# EAGLE board Linear Regulator (EAGLE 7.1.0)
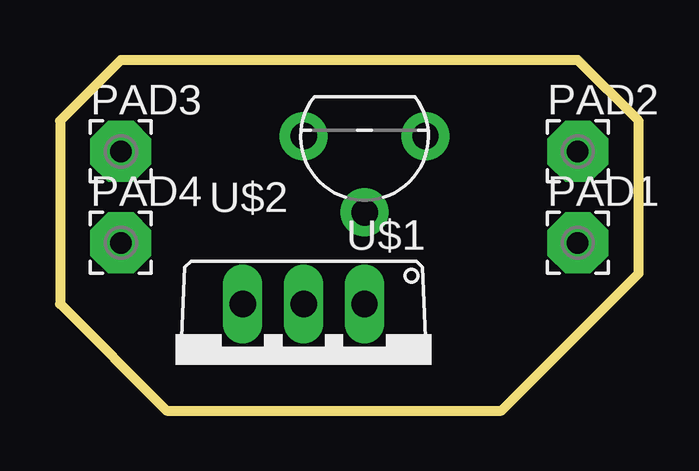
[diagram p0: board, top side]
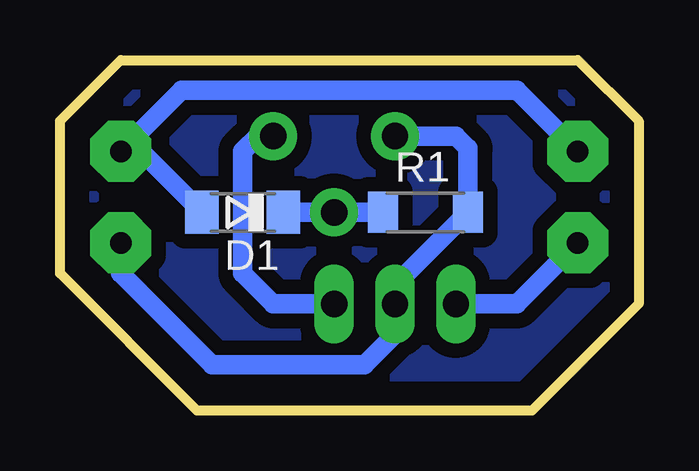
[diagram p1: board, bottom side, seen from below]

Size 24.13 x 14.6 mm. Coordinates in mm from the lower left corner, seen from the top.
Outline: 0,12.06 0,4.45 4.44,0 18.41,0 24.13,5.71 24.13,12.06 21.59,14.6 2.54,14.6 0,12.06
Copper layers (1*16): Top 0.035mm / dielectric 1.5mm / Bottom 0.035mm
Design rules "default": minimum track width 10mil, minimum drill 24mil, track to track 8mil, track to pad 8mil, pad to pad 8mil, via to via 8mil, smd to smd 8mil, copper to edge 40mil, drill to drill 8mil, minimum pad ring 10mil, minimum via ring 8mil, stop-mask expansion 4mil, vias tented up to drill 0mil, thermal gap 10mil

## Footprints (pad centres in the part's own frame; a part is rotated, then mirrored left to right if it is on the bottom)
SOD80C = smd 1.4 x 1.8: A 1.7,0; C -1.7,0
2,54/0,9 = drill 0.9 pad 2.54 octagon: 1 0,0
R1206 = smd 1.25 x 1.7: 1 -1.775,0; 2 1.775,0
TO220AV = drill 1.1 pad 1.5 long: B -2.54,-2.54; C 0,-2.54; E 2.54,-2.54
SOT-92WIDE = drill 1.1 pad 2: B 0,2.54; C 2.54,-0.635; E -2.54,-0.635

## Placement (x,y rotation side)
D1  15V  [SOD80C]  16.51,8.26 180 bottom
PAD1  [2,54/0,9]  21.59,6.98 0 top
PAD2  [2,54/0,9]  21.59,10.8 0 top
PAD3  [2,54/0,9]  2.54,10.8 0 top
PAD4  [2,54/0,9]  2.54,6.98 0 top
R1  [R1206]  8.89,8.26 0 bottom
U$1  MFR475V  [TO220AV]  10.16,1.91 180 top
U$2  KSP42TA  [SOT-92WIDE]  12.7,10.8 180 top

## Library data of the parts
D1 = diode
PAD1-PAD4 = wirepad
R1 = rcl
U$1 = transistor-power
U$2 = Namenlos

## Nets
N$1: D1.C R1.1 U$2.B
N$3: PAD1.1 R1.2 U$1.C U$2.C
N$4: U$1.B U$2.E
N$5: PAD4.1 U$1.E
N$6: D1.A PAD2.1 PAD3.1

## Tracks (layer width: path | path; a pad name or v marks a point on that pad's centre or on a via)
N$1
  Bottom 0.813: D1.C U$2.B R1.1
N$2
  pour Bottom (isolate 0.61): 0,4.45 0,12.06 2.54,14.6 21.59,14.6 24.13,12.06 24.13,5.71 17.78,-0.63 5.08,-0.63
N$3
  Bottom 0.813: U$2.C 7.62,11.43 7.12,10.92 R1.2 10.16,5.21 U$1.C 10.16,3.17 11.43,1.91 17.78,1.91 21.59,5.71 PAD1.1
N$4
  Bottom 0.813: U$2.E 15.87,11.43 16.51,10.8 16.51,5.71 15.24,4.45 U$1.B
N$5
  Bottom 0.813: U$1.E 5.08,4.45 PAD4.1
N$6
  Bottom 0.813: D1.A 20.75,10.8 PAD2.1 19.05,13.34 5.08,13.34 PAD3.1